# EAGLE board RG_Medium_Matrix-Panel-v12 (EAGLE 6.6.0), part 1 of 3
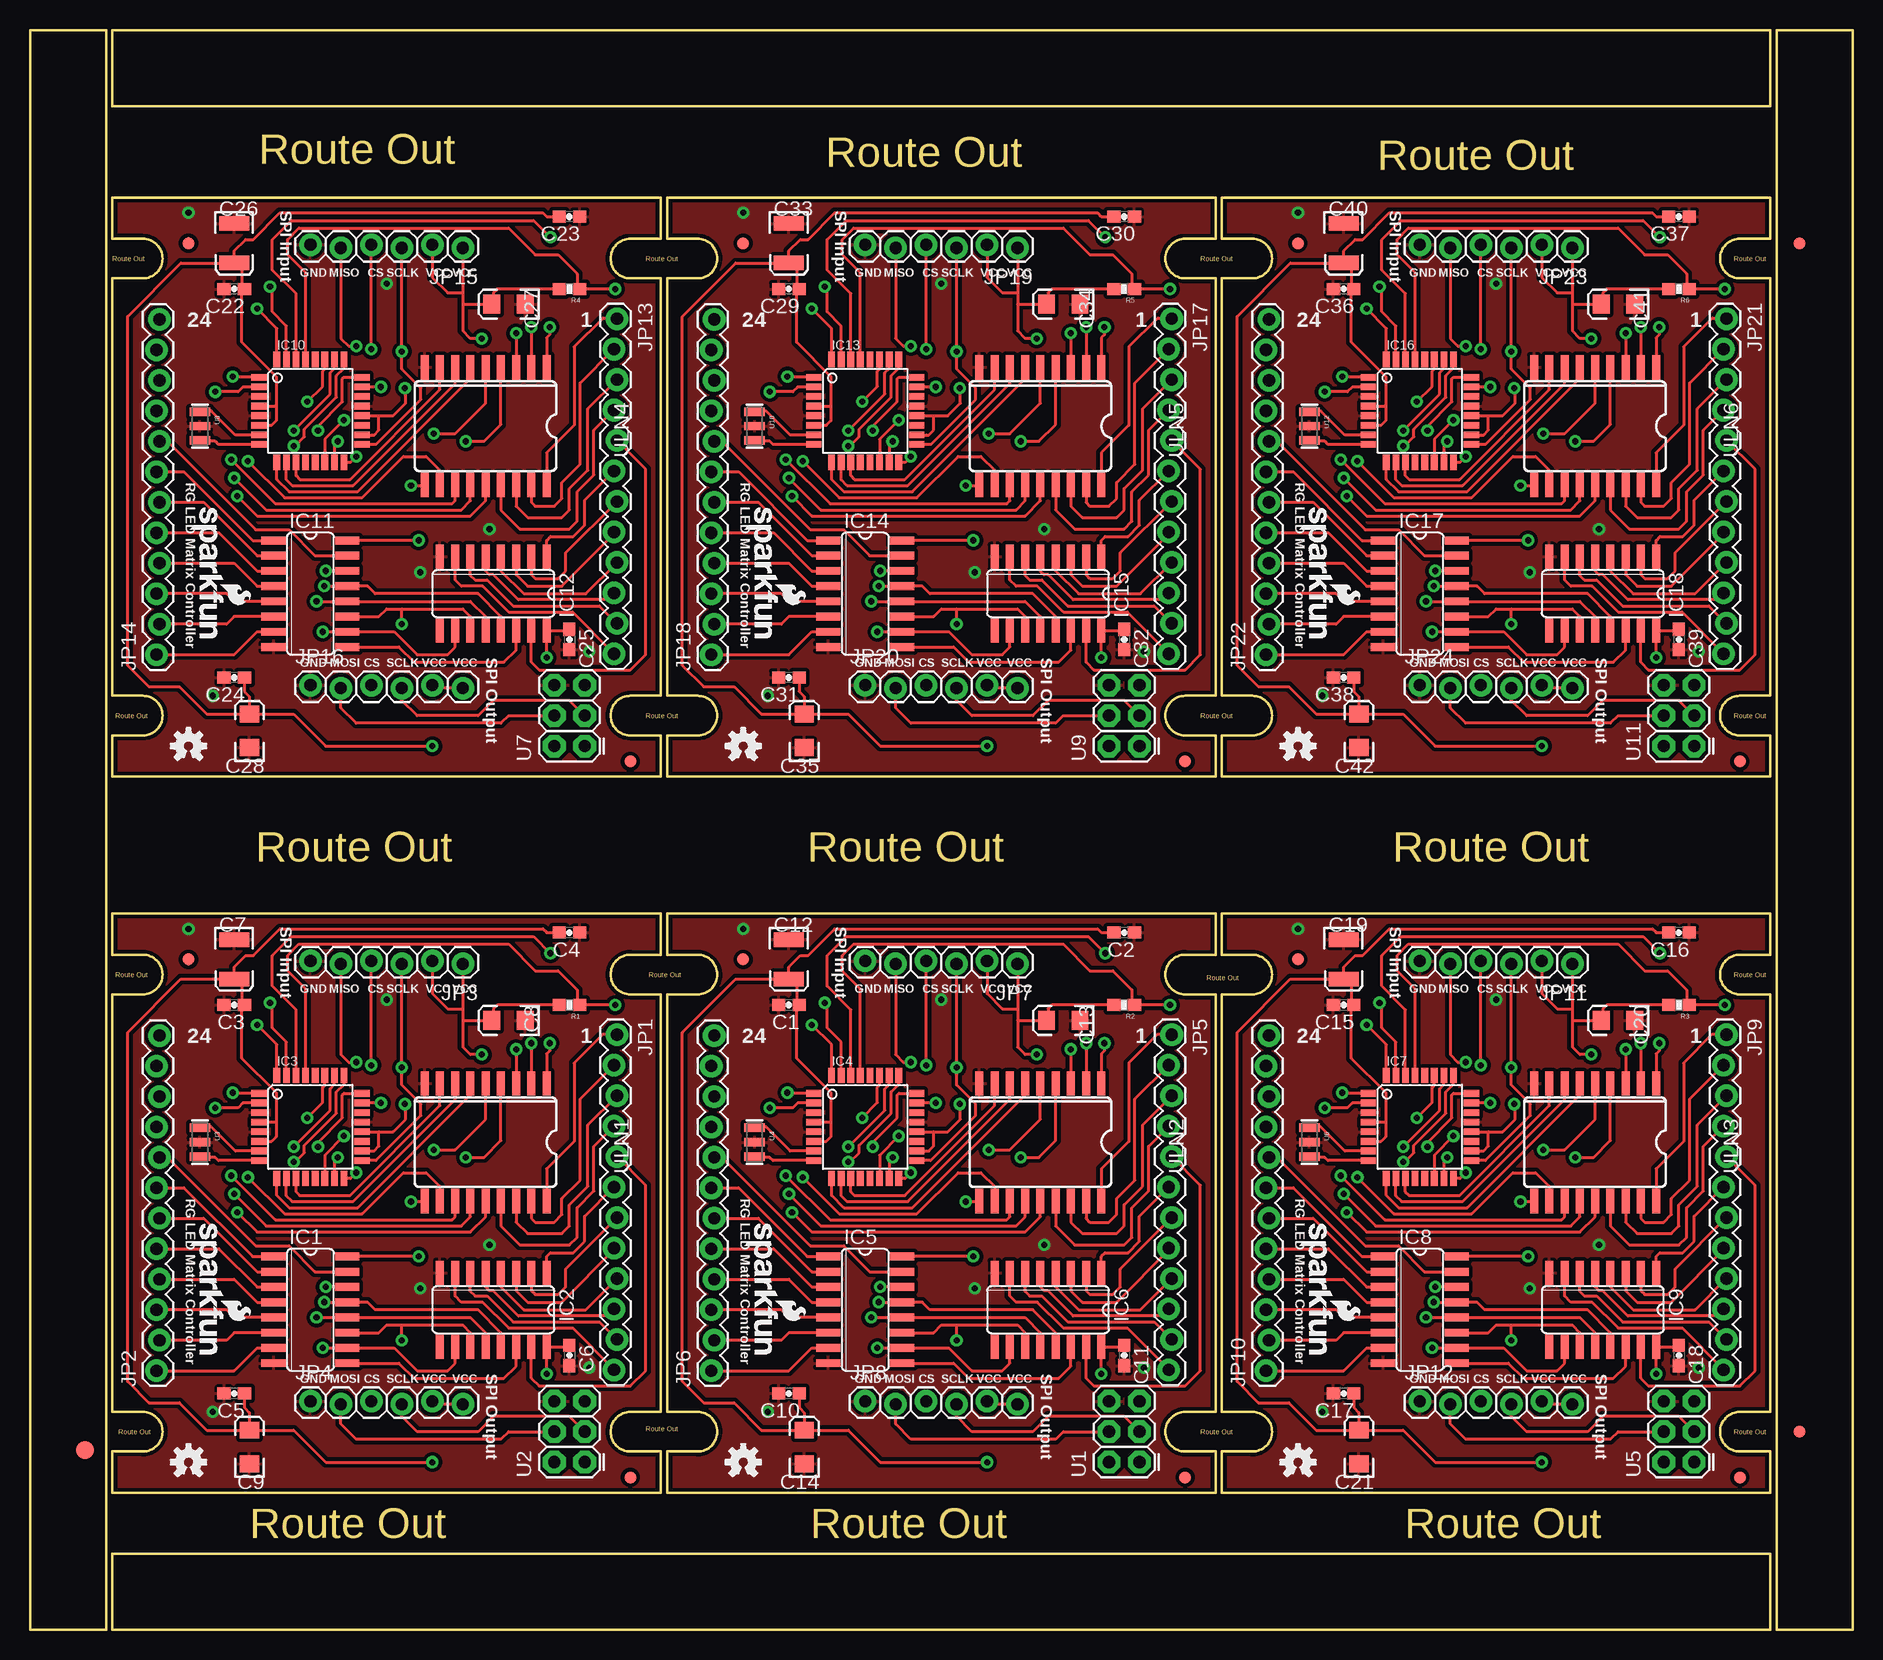
[diagram p0: board, top side]
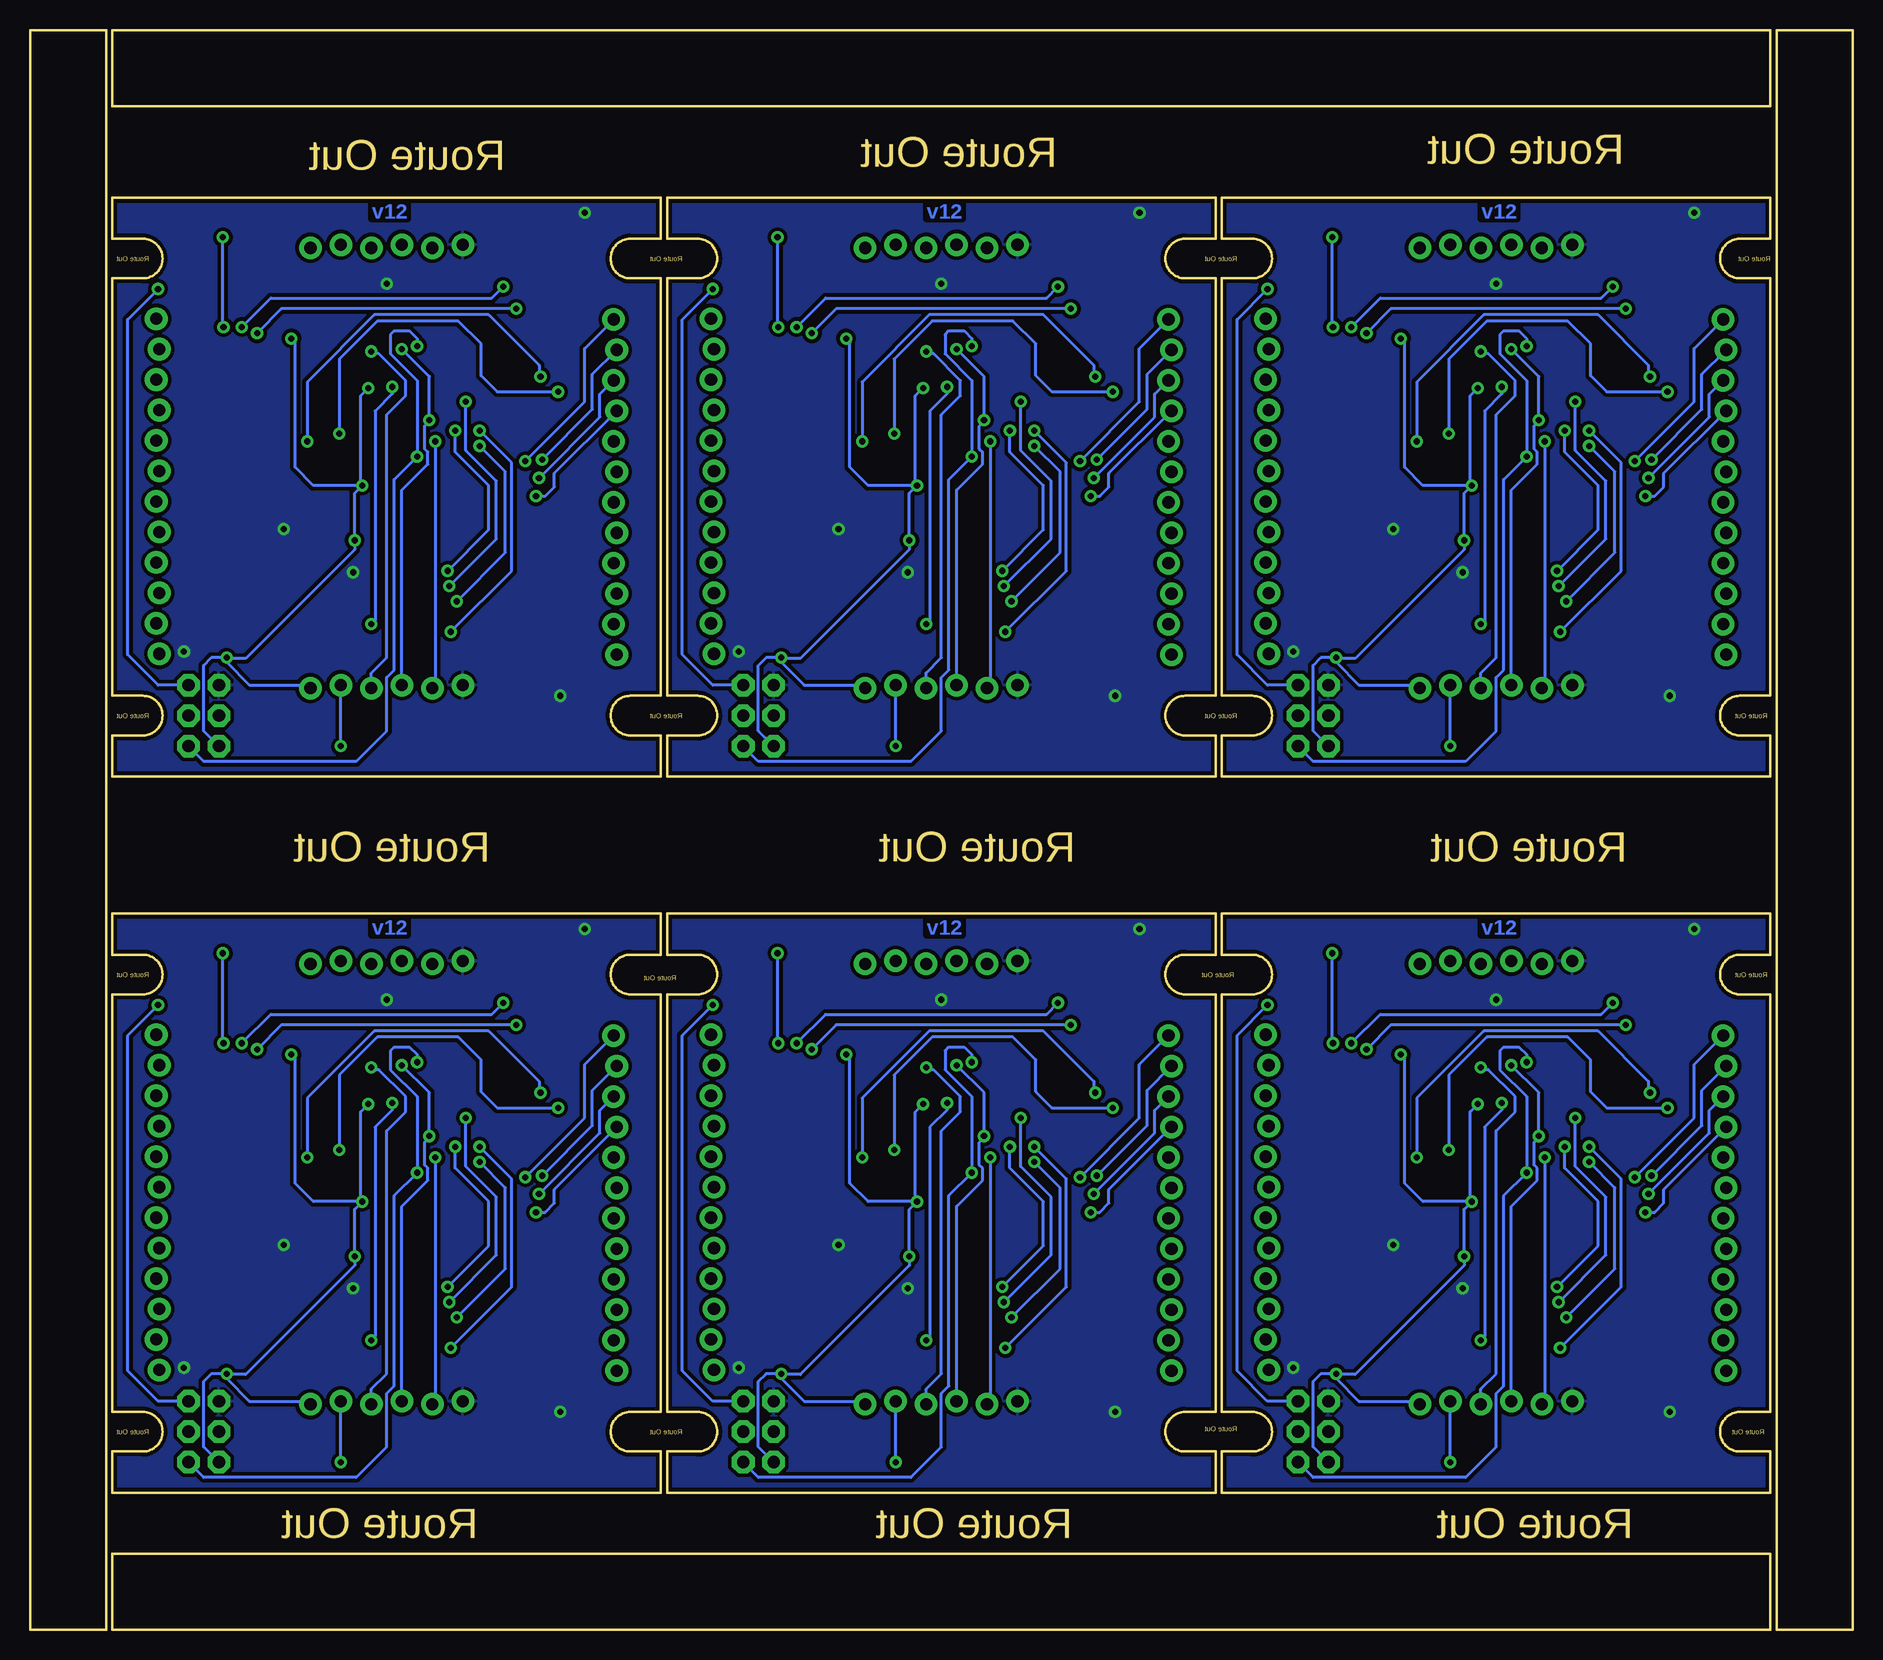
[diagram p1: board, bottom side, seen from below]

Size 151.89 x 133.35 mm. Coordinates in mm from the lower left corner, seen from the top.
Outline: 79.25,127 6.86,127 6.86,133.35 29.72,133.35
Outline: 25.91,133.35 145.03,133.35 145.03,127 75.44,127
Outline: 6.86,11.43 52.58,11.43 52.58,14.86 50.04,14.86 arc-180 50.04,18.16 52.58,18.16 52.58,52.96 50.04,52.96 arc-180 50.04,56.26 52.58,56.26 52.58,59.69 6.86,59.69 6.86,56.26 9.4,56.26 arc-180 9.4,52.96 6.86,52.96 6.86,18.16 9.4,18.16 arc-180 9.4,14.86 6.86,14.86 6.86,11.43
Outline: 53.09,11.43 98.81,11.43 98.81,14.86 96.27,14.86 arc-180 96.27,18.16 98.81,18.16 98.81,52.96 96.27,52.96 arc-180 96.27,56.26 98.81,56.26 98.81,59.69 53.09,59.69 53.09,56.26 55.63,56.26 arc-180 55.63,52.96 53.09,52.96 53.09,18.16 55.63,18.16 arc-180 55.63,14.86 53.09,14.86 53.09,11.43
Outline: 99.31,11.43 145.03,11.43 145.03,14.86 142.49,14.86 arc-180 142.49,18.16 145.03,18.16 145.03,52.96 142.49,52.96 arc-180 142.49,56.26 145.03,56.26 145.03,59.69 99.31,59.69 99.31,56.26 101.85,56.26 arc-180 101.85,52.96 99.31,52.96 99.31,18.16 101.85,18.16 arc-180 101.85,14.86 99.31,14.86 99.31,11.43
Outline: 6.86,71.12 52.58,71.12 52.58,74.55 50.04,74.55 arc-180 50.04,77.85 52.58,77.85 52.58,112.65 50.04,112.65 arc-180 50.04,115.95 52.58,115.95 52.58,119.38 6.86,119.38 6.86,115.95 9.4,115.95 arc-180 9.4,112.65 6.86,112.65 6.86,77.85 9.4,77.85 arc-180 9.4,74.55 6.86,74.55 6.86,71.12
Outline: 53.09,71.12 98.81,71.12 98.81,74.55 96.27,74.55 arc-180 96.27,77.85 98.81,77.85 98.81,112.65 96.27,112.65 arc-180 96.27,115.95 98.81,115.95 98.81,119.38 53.09,119.38 53.09,115.95 55.63,115.95 arc-180 55.63,112.65 53.09,112.65 53.09,77.85 55.63,77.85 arc-180 55.63,74.55 53.09,74.55 53.09,71.12
Outline: 99.31,71.12 145.03,71.12 145.03,74.55 142.49,74.55 arc-180 142.49,77.85 145.03,77.85 145.03,112.65 142.49,112.65 arc-180 142.49,115.95 145.03,115.95 145.03,119.38 99.31,119.38 99.31,115.95 101.85,115.95 arc-180 101.85,112.65 99.31,112.65 99.31,77.85 101.85,77.85 arc-180 101.85,74.55 99.31,74.55 99.31,71.12
Outline: 6.35,0 6.35,133.35 0,133.35 0,0 6.35,0
Outline: 145.54,133.35 145.54,0 151.89,0 151.89,133.35 145.54,133.35
Outline: 6.86,0 145.03,0 145.03,6.35 6.86,6.35 6.86,0
Copper layers (1*16): Top 0.035mm / dielectric 1.5mm / Bottom 0.035mm
Design rules "SparkFun-2-layer": minimum track width 7mil, minimum drill 15mil, track to track 8mil, track to pad 8mil, pad to pad 8mil, via to via 8mil, smd to smd 8mil, copper to edge 8mil, drill to drill 8mil, minimum pad ring 12mil, minimum via ring 10mil, stop-mask expansion 4mil, vias tented up to drill 20mil, thermal gap 10mil
Net classes: 0 DEFAULT: width 0.203 mm; 1 power: width 0.356 mm

## Footprints (pad centres in the part's own frame; a part is rotated, then mirrored left to right if it is on the bottom)
0603-CAP = smd 1.1 x 1: 1 -0.85,0; 2 0.85,0
EIA3528 = smd 1.2 x 2.5: A 1.65,0; C -1.65,0
EIA3216 = smd 1.4 x 1.6: A 1.4,0; C -1.4,0
FIDUCIAL-1.5X3 = smd 1.5 x 1.5: 1 0,0
FIDUCIAL-1X2 = smd 1 x 1: 1 0,0
SO16 = smd 0.66 x 2.032: 1 -4.445,-3.073; 2 -3.175,-3.073; 3 -1.905,-3.073; 4 -0.635,-3.073; 5 0.635,-3.073; 6 1.905,-3.073; 7 3.175,-3.073; 8 4.445,-3.073; 9 4.445,3.073; 10 3.175,3.073; 11 1.905,3.073; 12 0.635,3.073; 13 -0.635,3.073; 14 -1.905,3.073; 15 -3.175,3.073; 16 -4.445,3.073
TQFP32-08 = smd 1.27 x 0.559: 1 -4.293,2.8; 2 -4.293,2; 3 -4.293,1.2; 4 -4.293,0.4; 5 -4.293,-0.4; 6 -4.293,-1.2; 7 -4.293,-2; 8 -4.293,-2.8; 17 4.293,-2.8; 18 4.293,-2; 19 4.293,-1.2; 20 4.293,-0.4; 21 4.293,0.4; 22 4.293,1.2; 23 4.293,2; 24 4.293,2.8 | smd 0.559 x 1.27: 9 -2.8,-4.293; 10 -2,-4.293; 11 -1.2,-4.293; 12 -0.4,-4.293; 13 0.4,-4.293; 14 1.2,-4.293; 15 2,-4.293; 16 2.8,-4.293; 25 2.8,4.293; 26 2,4.293; 27 1.2,4.293; 28 0.4,4.293; 29 -0.4,4.293; 30 -1.2,4.293; 31 -2,4.293; 32 -2.8,4.293
1X12_LOCK = drill 1.016 pad 1.88: 1 0,0.127; 2 2.54,-0.127; 3 5.08,0.127; 4 7.62,-0.127; 5 10.16,0.127; 6 12.7,-0.127; 7 15.24,0.127; 8 17.78,-0.127; 9 20.32,0.127; 10 22.86,-0.127; 11 25.4,0.127; 12 27.94,-0.127
1X06_LOCK = drill 1.016 pad 1.88: 1 0,0; 2 2.54,-0.254; 3 5.08,0; 4 7.62,-0.254; 5 10.16,0; 6 12.7,-0.254
0603-RES = smd 1.1 x 1: 1 -0.85,0; 2 0.85,0
2X3 = drill 1.016 pad 1.88 octagon: 1 0,0; 2 0,2.54; 3 2.54,0; 4 2.54,2.54; 5 5.08,0; 6 5.08,2.54
RESONATOR-SMD = smd 0.7 x 1.7: 1 -1.2,0; 2 0,0; 3 1.2,0
SO18L = smd 0.66 x 2.032: 1 -0.635,-4.902; 2 0.635,-4.902; 3 1.905,-4.902; 4 3.175,-4.902; 5 4.445,-4.902; 6 5.715,-4.902; 7 6.985,-4.902; 8 8.255,-4.902; 9 9.525,-4.902; 10 9.525,4.902; 11 8.255,4.902; 12 6.985,4.902; 13 5.715,4.902; 14 4.445,4.902; 15 3.175,4.902; 16 1.905,4.902; 17 0.635,4.902; 18 -0.635,4.902

## Placement (x,y rotation side)
C1  .1uf  [0603-CAP]  63.25,52.07 180 top
C2  0.1uf  [0603-CAP]  91.19,58.1 180 top
C3  .1uf  [0603-CAP]  17.02,52.07 180 top
C4  0.1uf  [0603-CAP]  44.96,58.1 180 top
C5  0.1uF  [0603-CAP]  17.02,19.68 180 top
C6  0.1uf  [0603-CAP]  44.96,22.86 270 top
C7  47uF  [EIA3528]  17.02,55.88 270 top
C8  10uF  [EIA3216]  39.88,50.8 180 top
C9  10uF  [EIA3216]  18.29,15.24 90 top
C10  0.1uF  [0603-CAP]  63.25,19.68 180 top
C11  0.1uf  [0603-CAP]  91.19,22.86 270 top
C12  47uF  [EIA3528]  63.25,55.88 270 top
C13  10uF  [EIA3216]  86.11,50.8 180 top
C14  10uF  [EIA3216]  64.52,15.24 90 top
C15  .1uf  [0603-CAP]  109.47,52.07 180 top
C16  0.1uf  [0603-CAP]  137.41,58.1 180 top
C17  0.1uF  [0603-CAP]  109.47,19.68 180 top
C18  0.1uf  [0603-CAP]  137.41,22.86 270 top
C19  47uF  [EIA3528]  109.47,55.88 270 top
C20  10uF  [EIA3216]  132.33,50.8 180 top
C21  10uF  [EIA3216]  110.74,15.24 90 top
C22  .1uf  [0603-CAP]  17.02,111.76 180 top
C23  0.1uf  [0603-CAP]  44.96,117.79 180 top
C24  0.1uF  [0603-CAP]  17.02,79.38 180 top
C25  0.1uf  [0603-CAP]  44.96,82.55 270 top
C26  47uF  [EIA3528]  17.02,115.57 270 top
C27  10uF  [EIA3216]  39.88,110.49 180 top
C28  10uF  [EIA3216]  18.29,74.93 90 top
C29  .1uf  [0603-CAP]  63.25,111.76 180 top
C30  0.1uf  [0603-CAP]  91.19,117.79 180 top
C31  0.1uF  [0603-CAP]  63.25,79.38 180 top
C32  0.1uf  [0603-CAP]  91.19,82.55 270 top
C33  47uF  [EIA3528]  63.25,115.57 270 top
C34  10uF  [EIA3216]  86.11,110.49 180 top
C35  10uF  [EIA3216]  64.52,74.93 90 top
C36  .1uf  [0603-CAP]  109.47,111.76 180 top
C37  0.1uf  [0603-CAP]  137.41,117.79 180 top
C38  0.1uF  [0603-CAP]  109.47,79.38 180 top
C39  0.1uf  [0603-CAP]  137.41,82.55 270 top
C40  47uF  [EIA3528]  109.47,115.57 270 top
C41  10uF  [EIA3216]  132.33,110.49 180 top
C42  10uF  [EIA3216]  110.74,74.93 90 top
E$1  [FIDUCIAL-1.5X3]  4.57,14.99 0 top
E$3  [FIDUCIAL-1X2]  147.45,115.57 180 top
E$4  [FIDUCIAL-1X2]  147.45,16.51 0 top
IC1  74LS595D  [SO16]  23.37,26.67 270 top
IC2  74LS595D  [SO16]  38.61,26.67 180 top
IC3  [TQFP32-08]  23.37,41.91 0 top
IC4  [TQFP32-08]  69.6,41.91 0 top
IC5  74LS595D  [SO16]  69.6,26.67 270 top
IC6  74LS595D  [SO16]  84.84,26.67 180 top
IC7  [TQFP32-08]  115.82,41.91 0 top
IC8  74LS595D  [SO16]  115.82,26.67 270 top
IC9  74LS595D  [SO16]  131.06,26.67 180 top
IC10  [TQFP32-08]  23.37,101.6 0 top
IC11  74LS595D  [SO16]  23.37,86.36 270 top
IC12  74LS595D  [SO16]  38.61,86.36 180 top
IC13  [TQFP32-08]  69.6,101.6 0 top
IC14  74LS595D  [SO16]  69.6,86.36 270 top
IC15  74LS595D  [SO16]  84.84,86.36 180 top
IC16  [TQFP32-08]  115.82,101.6 0 top
IC17  74LS595D  [SO16]  115.82,86.36 270 top
IC18  74LS595D  [SO16]  131.06,86.36 180 top
JP1  M12LOCK  [1X12_LOCK]  48.79,49.59 270 top
JP2  M12LOCK  [1X12_LOCK]  10.67,21.59 90 top
JP3  [1X06_LOCK]  36.07,55.5 180 top
JP4  [1X06_LOCK]  23.37,19.05 0 top
JP5  M12LOCK  [1X12_LOCK]  95.02,49.59 270 top
JP6  M12LOCK  [1X12_LOCK]  56.9,21.59 90 top
JP7  [1X06_LOCK]  82.3,55.5 180 top
JP8  [1X06_LOCK]  69.6,19.05 0 top
JP9  M12LOCK  [1X12_LOCK]  141.25,49.59 270 top
JP10  M12LOCK  [1X12_LOCK]  103.12,21.59 90 top
JP11  [1X06_LOCK]  128.52,55.5 180 top
JP12  [1X06_LOCK]  115.82,19.05 0 top
JP13  M12LOCK  [1X12_LOCK]  48.79,109.28 270 top
JP14  M12LOCK  [1X12_LOCK]  10.67,81.28 90 top
JP15  [1X06_LOCK]  36.07,115.19 180 top
JP16  [1X06_LOCK]  23.37,78.74 0 top
JP17  M12LOCK  [1X12_LOCK]  95.02,109.28 270 top
JP18  M12LOCK  [1X12_LOCK]  56.9,81.28 90 top
JP19  [1X06_LOCK]  82.3,115.19 180 top
JP20  [1X06_LOCK]  69.6,78.74 0 top
JP21  M12LOCK  [1X12_LOCK]  141.25,109.28 270 top
JP22  M12LOCK  [1X12_LOCK]  103.12,81.28 90 top
JP23  [1X06_LOCK]  128.52,115.19 180 top
JP24  [1X06_LOCK]  115.82,78.74 0 top
LOGO1  OSHW-LOGOS  [OSHW-LOGO-S]  13.21,13.97 0 top
LOGO2  SFE_LOGO_NAME_FLAME.1_INCH  [SFE_LOGO_NAME_FLAME_.1]  13.21,34.29 270 top
LOGO3  OSHW-LOGOS  [OSHW-LOGO-S]  59.44,13.97 0 top
LOGO4  SFE_LOGO_NAME_FLAME.1_INCH  [SFE_LOGO_NAME_FLAME_.1]  59.44,34.29 270 top
LOGO5  OSHW-LOGOS  [OSHW-LOGO-S]  105.66,13.97 0 top
LOGO6  SFE_LOGO_NAME_FLAME.1_INCH  [SFE_LOGO_NAME_FLAME_.1]  105.66,34.29 270 top
LOGO7  OSHW-LOGOS  [OSHW-LOGO-S]  13.21,73.66 0 top
LOGO8  SFE_LOGO_NAME_FLAME.1_INCH  [SFE_LOGO_NAME_FLAME_.1]  13.21,93.98 270 top
LOGO9  OSHW-LOGOS  [OSHW-LOGO-S]  59.44,73.66 0 top
LOGO10  SFE_LOGO_NAME_FLAME.1_INCH  [SFE_LOGO_NAME_FLAME_.1]  59.44,93.98 270 top
LOGO11  OSHW-LOGOS  [OSHW-LOGO-S]  105.66,73.66 0 top
LOGO12  SFE_LOGO_NAME_FLAME.1_INCH  [SFE_LOGO_NAME_FLAME_.1]  105.66,93.98 270 top
R1  10K  [0603-RES]  44.96,52.07 180 top
R2  10K  [0603-RES]  91.19,52.07 180 top
R3  10K  [0603-RES]  137.41,52.07 180 top
R4  10K  [0603-RES]  44.96,111.76 180 top
R5  10K  [0603-RES]  91.19,111.76 180 top
R6  10K  [0603-RES]  137.41,111.76 180 top
U1  AVR_SPI_PRG_6PTH  [2X3]  92.46,13.97 90 top
U2  AVR_SPI_PRG_6PTH  [2X3]  46.23,13.97 90 top
U3  16MHz  [RESONATOR-SMD]  14.16,40.64 270 top
U4  16MHz  [RESONATOR-SMD]  60.39,40.64 270 top
U5  AVR_SPI_PRG_6PTH  [2X3]  138.68,13.97 90 top
U6  16MHz  [RESONATOR-SMD]  106.62,40.64 270 top
U7  AVR_SPI_PRG_6PTH  [2X3]  46.23,73.66 90 top
U8  16MHz  [RESONATOR-SMD]  14.16,100.33 270 top
U9  AVR_SPI_PRG_6PTH  [2X3]  92.46,73.66 90 top
U10  16MHz  [RESONATOR-SMD]  60.39,100.33 270 top
U11  AVR_SPI_PRG_6PTH  [2X3]  138.68,73.66 90 top
U12  16MHz  [RESONATOR-SMD]  106.62,100.33 270 top
U$1  FIDUCIAL1X2  [FIDUCIAL-1X2]  13.21,55.88 0 top
U$2  FIDUCIAL1X2  [FIDUCIAL-1X2]  59.44,55.88 0 top
U$3  FIDUCIAL1X2  [FIDUCIAL-1X2]  50.04,12.7 0 top
U$4  FIDUCIAL1X2  [FIDUCIAL-1X2]  96.27,12.7 0 top
U$5  FIDUCIAL1X2  [FIDUCIAL-1X2]  105.66,55.88 0 top
U$6  FIDUCIAL1X2  [FIDUCIAL-1X2]  142.49,12.7 0 top
U$7  FIDUCIAL1X2  [FIDUCIAL-1X2]  13.21,115.57 0 top
U$8  FIDUCIAL1X2  [FIDUCIAL-1X2]  50.04,72.39 0 top
U$9  FIDUCIAL1X2  [FIDUCIAL-1X2]  59.44,115.57 0 top
U$10  FIDUCIAL1X2  [FIDUCIAL-1X2]  96.27,72.39 0 top
U$11  FIDUCIAL1X2  [FIDUCIAL-1X2]  105.66,115.57 0 top
U$12  FIDUCIAL1X2  [FIDUCIAL-1X2]  142.49,72.39 0 top
ULN1  uln2803  [SO18L]  42.42,40.64 180 top
ULN2  uln2803  [SO18L]  88.65,40.64 180 top
ULN3  uln2803  [SO18L]  134.87,40.64 180 top
ULN4  uln2803  [SO18L]  42.42,100.33 180 top
ULN5  uln2803  [SO18L]  88.65,100.33 180 top
ULN6  uln2803  [SO18L]  134.87,100.33 180 top

## Library data of the parts
C1-C4 C6 C11 C15 C16 C18 C22 C23 C25 C29 C30 C32 C36 C37 C39 = SparkFun-Capacitors; PROD_ID: CAP-00810; VALUE: 0.1uF
C5 C10 C17 C24 C31 C38 = SparkFun-Capacitors; PROD_ID: CAP-00810
C7-C9 C12-C14 C19-C21 C26-C28 C33-C35 C40-C42 IC1 IC2 IC5 IC6 IC8 IC9 IC11 IC12 IC14 IC15 IC17 IC18 U3 U4 U6 U8 U10 U12 U$1-U$12 ULN1-ULN6 = SparkFun
E$1 = SparkFun-Retired
E$3 E$4 LOGO1-LOGO12 = SparkFun-Aesthetics
IC3 IC4 IC7 IC10 IC13 IC16 = SparkFun-DigitalIC; PROD_ID: IC-09069; VALUE: ATMEGA328P
JP1-JP24 U1 U2 U5 U7 U9 U11 = SparkFun-Connectors
R1-R6 = SparkFun-Resistors; PROD_ID: RES-00824

## Nets
CS: IC3.14 JP3.4 JP4.3
CS1: IC4.14 JP7.4 JP8.3
CS2: IC7.14 JP11.4 JP12.3
CS3: IC10.14 JP15.4 JP16.3
CS4: IC13.14 JP19.4 JP20.3
CS5: IC16.14 JP23.4 JP24.3
G1: IC2.15 JP1.5
G2: IC2.1 JP1.6
G3: IC2.2 JP1.7
G4: IC2.3 JP1.8
G5: IC2.4 JP1.9
G6: IC2.5 JP1.10
G7: IC2.6 JP1.11
G8: IC2.7 JP1.12
G9: IC6.15 JP5.5
G10: IC6.1 JP5.6
G11: IC6.2 JP5.7
G12: IC6.3 JP5.8
G13: IC6.4 JP5.9
G14: IC6.5 JP5.10
G15: IC6.6 JP5.11
G16: IC6.7 JP5.12
G17: IC9.15 JP9.5
G18: IC9.1 JP9.6
G19: IC9.2 JP9.7
G20: IC9.3 JP9.8
G21: IC9.4 JP9.9
G22: IC9.5 JP9.10
G23: IC9.6 JP9.11
G24: IC9.7 JP9.12
G25: IC12.15 JP13.5
G26: IC12.1 JP13.6
G27: IC12.2 JP13.7
G28: IC12.3 JP13.8
G29: IC12.4 JP13.9
G30: IC12.5 JP13.10
G31: IC12.6 JP13.11
G32: IC12.7 JP13.12
G33: IC15.15 JP17.5
G34: IC15.1 JP17.6
G35: IC15.2 JP17.7
G36: IC15.3 JP17.8
G37: IC15.4 JP17.9
G38: IC15.5 JP17.10
G39: IC15.6 JP17.11
G40: IC15.7 JP17.12
G41: IC18.15 JP21.5
G42: IC18.1 JP21.6
G43: IC18.2 JP21.7
G44: IC18.3 JP21.8
G45: IC18.4 JP21.9
G46: IC18.5 JP21.10
G47: IC18.6 JP21.11
G48: IC18.7 JP21.12
GND: C3.2 C4.1 C5.2 C6.2 C7.C C8.C C9.C IC1.8 IC2.8 IC3.3 IC3.5 IC3.21 JP3.6 JP4.1 U2.6 U3.2 ULN1.9
GND1: C1.2 C2.1 C10.2 C11.2 C12.C C13.C C14.C IC4.3 IC4.5 IC4.21 IC5.8 IC6.8 JP7.6 JP8.1 U1.6 U4.2 ULN2.9
GND2: C15.2 C16.1 C17.2 C18.2 C19.C C20.C C21.C IC7.3 IC7.5 IC7.21 IC8.8 IC9.8 JP11.6 JP12.1 U5.6 U6.2 ULN3.9
GND3: C22.2 C23.1 C24.2 C25.2 C26.C C27.C C28.C IC10.3 IC10.5 IC10.21 IC11.8 IC12.8 JP15.6 JP16.1 U7.6 U8.2 ULN4.9
GND4: C29.2 C30.1 C31.2 C32.2 C33.C C34.C C35.C IC13.3 IC13.5 IC13.21 IC14.8 IC15.8 JP19.6 JP20.1 U9.6 U10.2 ULN5.9
GND5: C36.2 C37.1 C38.2 C39.2 C40.C C41.C C42.C IC16.3 IC16.5 IC16.21 IC17.8 IC18.8 JP23.6 JP24.1 U11.6 U12.2 ULN6.9
MISO: IC3.16 JP3.5 U2.1
MISO1: IC4.16 JP7.5 U1.1
MISO2: IC7.16 JP11.5 U5.1
MISO3: IC10.16 JP15.5 U7.1
MISO4: IC13.16 JP19.5 U9.1
MISO5: IC16.16 JP23.5 U11.1
MOSI: IC3.15 JP4.2 U2.4
MOSI1: IC4.15 JP8.2 U1.4
MOSI2: IC7.15 JP12.2 U5.4
MOSI3: IC10.15 JP16.2 U7.4
MOSI4: IC13.15 JP20.2 U9.4
MOSI5: IC16.15 JP24.2 U11.4
N$1: IC3.7 U3.1
N$2: IC3.8 U3.3
N$3: IC5.9 IC6.14
N$4: IC4.7 U4.1
N$5: IC4.8 U4.3
N$6: IC8.9 IC9.14
N$7: IC7.7 U6.1
N$8: IC7.8 U6.3
N$9: IC11.9 IC12.14
N$10: IC10.7 U8.1
N$11: IC10.8 U8.3
N$12: IC14.9 IC15.14
N$13: IC13.7 U10.1
N$14: IC13.8 U10.3
N$15: IC17.9 IC18.14
N$16: IC16.7 U12.1
N$17: IC16.8 U12.3
N$30: IC1.9 IC2.14
R1: IC1.15 JP2.8
R2: IC1.1 JP2.7
R3: IC1.2 JP2.6
R4: IC1.3 JP2.5
R5: IC1.4 JP2.4
R6: IC1.5 JP2.3
R7: IC1.6 JP2.2
R8: IC1.7 JP2.1
R9: IC5.15 JP6.8
R10: IC5.1 JP6.7
R11: IC5.2 JP6.6
R12: IC5.3 JP6.5
R13: IC5.4 JP6.4
R14: IC5.5 JP6.3
R15: IC5.6 JP6.2
R16: IC5.7 JP6.1
R17: IC8.15 JP10.8
R18: IC8.1 JP10.7
R19: IC8.2 JP10.6
R20: IC8.3 JP10.5
R21: IC8.4 JP10.4
R22: IC8.5 JP10.3
R23: IC8.6 JP10.2
R24: IC8.7 JP10.1
R25: IC11.15 JP14.8
R26: IC11.1 JP14.7
R27: IC11.2 JP14.6
R28: IC11.3 JP14.5
R29: IC11.4 JP14.4
R30: IC11.5 JP14.3
R31: IC11.6 JP14.2
R32: IC11.7 JP14.1
R33: IC14.15 JP18.8
R34: IC14.1 JP18.7
R35: IC14.2 JP18.6
R36: IC14.3 JP18.5
R37: IC14.4 JP18.4
R38: IC14.5 JP18.3
R39: IC14.6 JP18.2
R40: IC14.7 JP18.1
R41: IC17.15 JP22.8
R42: IC17.1 JP22.7
R43: IC17.2 JP22.6
R44: IC17.3 JP22.5
R45: IC17.4 JP22.4
R46: IC17.5 JP22.3
R47: IC17.6 JP22.2
R48: IC17.7 JP22.1
ROW1: IC3.30 ULN1.1
ROW2: IC3.31 ULN1.2
ROW3: IC3.32 ULN1.3
ROW4: IC3.1 ULN1.4
ROW5: IC3.2 ULN1.5
ROW6: IC3.9 ULN1.6
ROW7: IC3.10 ULN1.7
ROW8: IC3.11 ULN1.8
ROW9: IC4.30 ULN2.1
ROW10: IC4.31 ULN2.2
ROW11: IC4.32 ULN2.3
ROW12: IC4.1 ULN2.4
ROW13: IC4.2 ULN2.5
ROW14: IC4.9 ULN2.6
ROW15: IC4.10 ULN2.7
ROW16: IC4.11 ULN2.8
ROW17: IC7.30 ULN3.1
ROW18: IC7.31 ULN3.2
ROW19: IC7.32 ULN3.3
ROW20: IC7.1 ULN3.4
ROW21: IC7.2 ULN3.5
ROW22: IC7.9 ULN3.6
ROW23: IC7.10 ULN3.7
ROW24: IC7.11 ULN3.8
ROW25: IC10.30 ULN4.1
ROW26: IC10.31 ULN4.2
ROW27: IC10.32 ULN4.3
ROW28: IC10.1 ULN4.4
ROW29: IC10.2 ULN4.5
ROW30: IC10.9 ULN4.6
ROW31: IC10.10 ULN4.7
ROW32: IC10.11 ULN4.8
ROW33: IC13.30 ULN5.1
ROW34: IC13.31 ULN5.2
ROW35: IC13.32 ULN5.3
ROW36: IC13.1 ULN5.4
ROW37: IC13.2 ULN5.5
ROW38: IC13.9 ULN5.6
ROW39: IC13.10 ULN5.7
ROW40: IC13.11 ULN5.8
ROW41: IC16.30 ULN6.1
ROW42: IC16.31 ULN6.2
ROW43: IC16.32 ULN6.3
ROW44: IC16.1 ULN6.4
ROW45: IC16.2 ULN6.5
ROW46: IC16.9 ULN6.6
ROW47: IC16.10 ULN6.7
ROW48: IC16.11 ULN6.8
ROW_1: JP1.1 ULN1.18
ROW_2: JP1.2 ULN1.17
ROW_3: JP1.3 ULN1.16
ROW_4: JP1.4 ULN1.15
ROW_5: JP2.9 ULN1.14
ROW_6: JP2.10 ULN1.13
ROW_7: JP2.11 ULN1.12
ROW_8: JP2.12 ULN1.11
ROW_9: JP5.1 ULN2.18
ROW_10: JP5.2 ULN2.17
ROW_11: JP5.3 ULN2.16
ROW_12: JP5.4 ULN2.15
ROW_13: JP6.9 ULN2.14
ROW_14: JP6.10 ULN2.13
ROW_15: JP6.11 ULN2.12
ROW_16: JP6.12 ULN2.11
ROW_17: JP9.1 ULN3.18
ROW_18: JP9.2 ULN3.17
ROW_19: JP9.3 ULN3.16
ROW_20: JP9.4 ULN3.15
ROW_21: JP10.9 ULN3.14
ROW_22: JP10.10 ULN3.13
ROW_23: JP10.11 ULN3.12
ROW_24: JP10.12 ULN3.11
ROW_25: JP13.1 ULN4.18
ROW_26: JP13.2 ULN4.17
ROW_27: JP13.3 ULN4.16
ROW_28: JP13.4 ULN4.15
ROW_29: JP14.9 ULN4.14
ROW_30: JP14.10 ULN4.13
ROW_31: JP14.11 ULN4.12
ROW_32: JP14.12 ULN4.11
ROW_33: JP17.1 ULN5.18
ROW_34: JP17.2 ULN5.17
ROW_35: JP17.3 ULN5.16
ROW_36: JP17.4 ULN5.15
ROW_37: JP18.9 ULN5.14
ROW_38: JP18.10 ULN5.13
ROW_39: JP18.11 ULN5.12
ROW_40: JP18.12 ULN5.11
ROW_41: JP21.1 ULN6.18
ROW_42: JP21.2 ULN6.17
ROW_43: JP21.3 ULN6.16
ROW_44: JP21.4 ULN6.15
ROW_45: JP22.9 ULN6.14
ROW_46: JP22.10 ULN6.13
ROW_47: JP22.11 ULN6.12
ROW_48: JP22.12 ULN6.11
RST: IC3.29 R1.1 U2.5
RST1: IC4.29 R2.1 U1.5
RST2: IC7.29 R3.1 U5.5
RST3: IC10.29 R4.1 U7.5
RST4: IC13.29 R5.1 U9.5
RST5: IC16.29 R6.1 U11.5
SCK: IC3.17 JP3.3 JP4.4 U2.3
SCK1: IC4.17 JP7.3 JP8.4 U1.3
SCK2: IC7.17 JP11.3 JP12.4 U5.3
SCK3: IC10.17 JP15.3 JP16.4 U7.3
SCK4: IC13.17 JP19.3 JP20.4 U9.3
SCK5: IC16.17 JP23.3 JP24.4 U11.3
SR_CLEAR: IC1.10 IC2.10 IC3.26
SR_CLEAR1: IC4.26 IC5.10 IC6.10
SR_CLEAR2: IC7.26 IC8.10 IC9.10
SR_CLEAR3: IC10.26 IC11.10 IC12.10
SR_CLEAR4: IC13.26 IC14.10 IC15.10
SR_CLEAR5: IC16.26 IC17.10 IC18.10
SR_DATA: IC1.14 IC3.24
SR_DATA1: IC4.24 IC5.14
SR_DATA2: IC7.24 IC8.14
SR_DATA3: IC10.24 IC11.14
SR_DATA4: IC13.24 IC14.14
SR_DATA5: IC16.24 IC17.14
SR_EN: IC1.13 IC2.13 IC3.27
SR_EN1: IC4.27 IC5.13 IC6.13
SR_EN2: IC7.27 IC8.13 IC9.13
SR_EN3: IC10.27 IC11.13 IC12.13
SR_EN4: IC13.27 IC14.13 IC15.13
SR_EN5: IC16.27 IC17.13 IC18.13
SR_LATCH: IC1.12 IC2.12 IC3.25
SR_LATCH1: IC4.25 IC5.12 IC6.12
SR_LATCH2: IC7.25 IC8.12 IC9.12
SR_LATCH3: IC10.25 IC11.12 IC12.12
SR_LATCH4: IC13.25 IC14.12 IC15.12
SR_LATCH5: IC16.25 IC17.12 IC18.12
SR_SCK: IC1.11 IC2.11 IC3.23
SR_SCK1: IC4.23 IC5.11 IC6.11
SR_SCK2: IC7.23 IC8.11 IC9.11
SR_SCK3: IC10.23 IC11.11 IC12.11
SR_SCK4: IC13.23 IC14.11 IC15.11
SR_SCK5: IC16.23 IC17.11 IC18.11
VCC: C3.1 C4.2 C5.1 C6.1 C7.A C8.A C9.A IC1.16 IC2.16 IC3.4 IC3.6 IC3.18 IC3.20 JP3.1 JP3.2 JP4.5 JP4.6 R1.2 U2.2 ULN1.10
VCC1: C1.1 C2.2 C10.1 C11.1 C12.A C13.A C14.A IC4.4 IC4.6 IC4.18 IC4.20 IC5.16 IC6.16 JP7.1 JP7.2 JP8.5 JP8.6 R2.2 U1.2 ULN2.10
VCC2: C15.1 C16.2 C17.1 C18.1 C19.A C20.A C21.A IC7.4 IC7.6 IC7.18 IC7.20 IC8.16 IC9.16 JP11.1 JP11.2 JP12.5 JP12.6 R3.2 U5.2 ULN3.10
VCC3: C22.1 C23.2 C24.1 C25.1 C26.A C27.A C28.A IC10.4 IC10.6 IC10.18 IC10.20 IC11.16 IC12.16 JP15.1 JP15.2 JP16.5 JP16.6 R4.2 U7.2 ULN4.10
VCC4: C29.1 C30.2 C31.1 C32.1 C33.A C34.A C35.A IC13.4 IC13.6 IC13.18 IC13.20 IC14.16 IC15.16 JP19.1 JP19.2 JP20.5 JP20.6 R5.2 U9.2 ULN5.10
VCC5: C36.1 C37.2 C38.1 C39.1 C40.A C41.A C42.A IC16.4 IC16.6 IC16.18 IC16.20 IC17.16 IC18.16 JP23.1 JP23.2 JP24.5 JP24.6 R6.2 U11.2 ULN6.10